# Altium PCB tl.PcbDoc
Units mm, origin at the board's own origin, x right, y up, seen from the top; angles counter-clockwise.
Board outline 60.1 x 82.1 mm, 4 copper layers (Top Layer, Layer 1, Layer 2, Bottom Layer), stack 0.603 mm thick; 8 components, 5 nets, 40 pads, 136 vias.
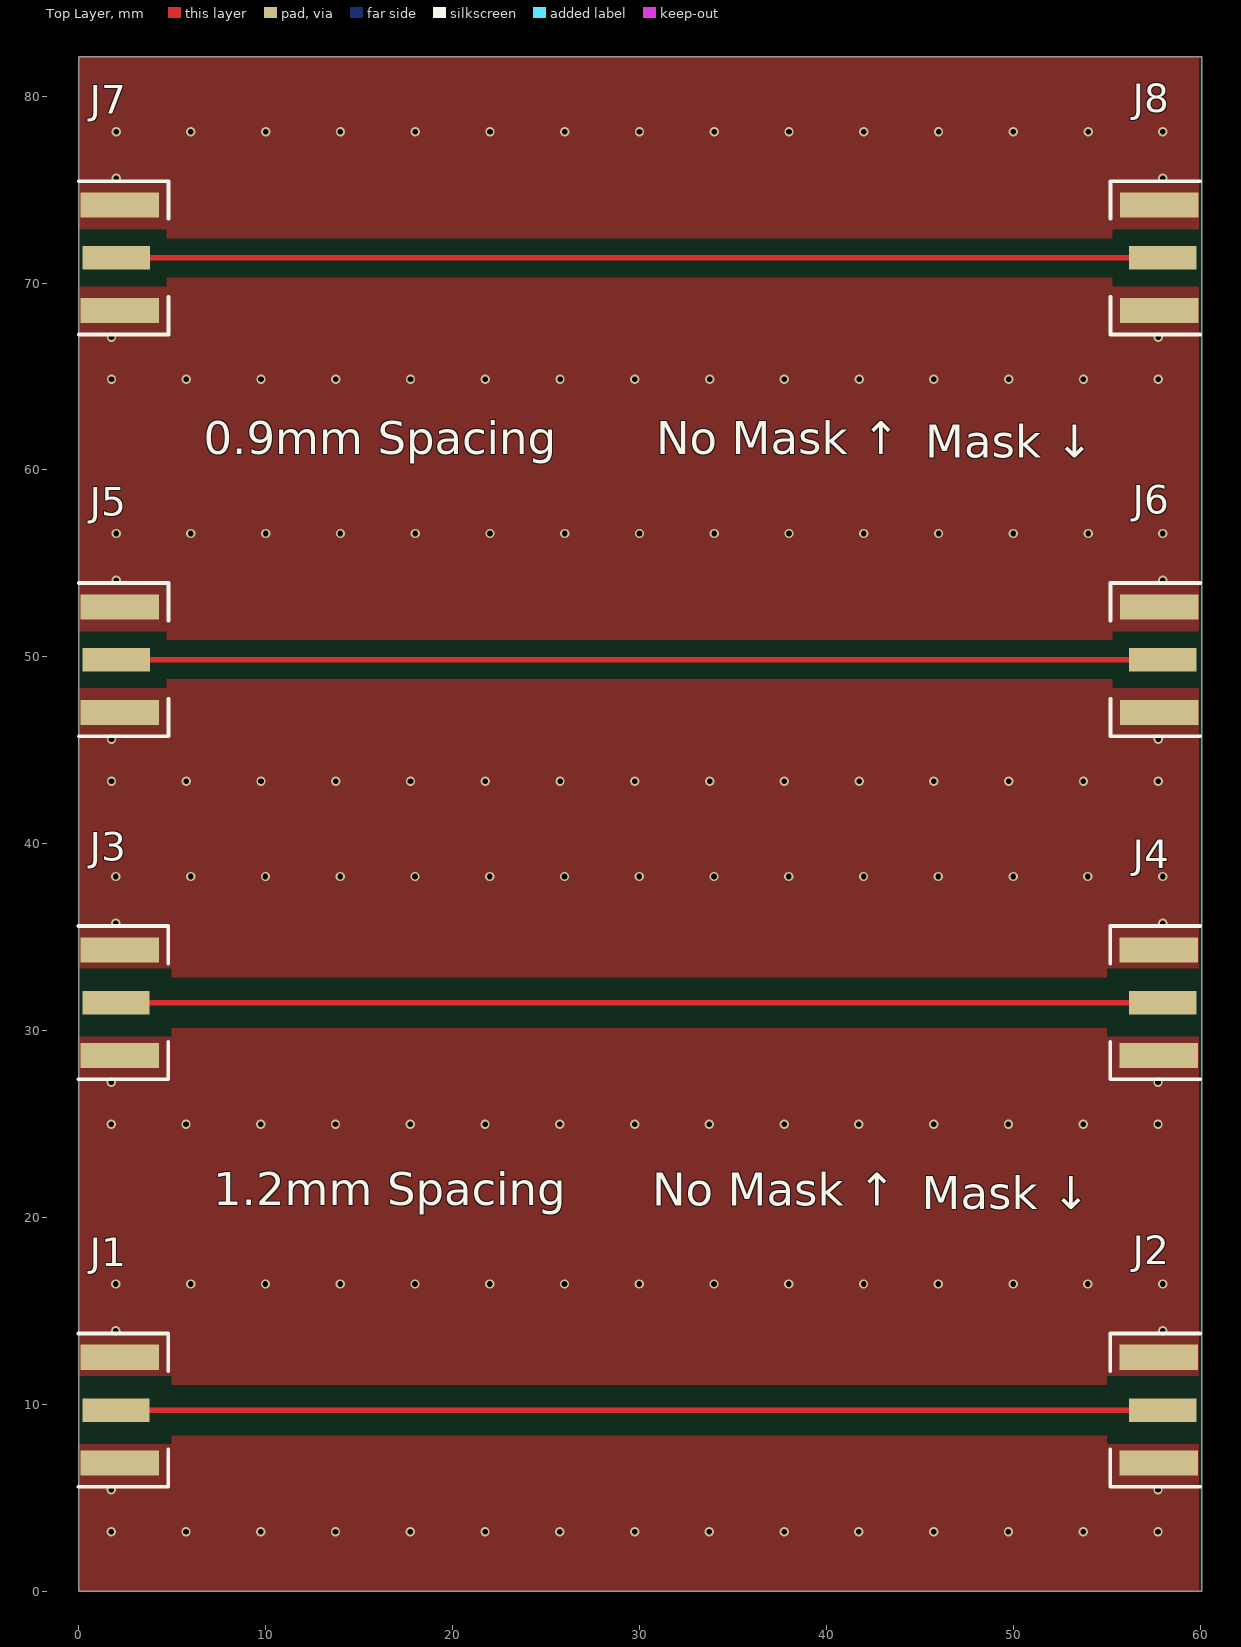
[diagram p0: Top Layer view]
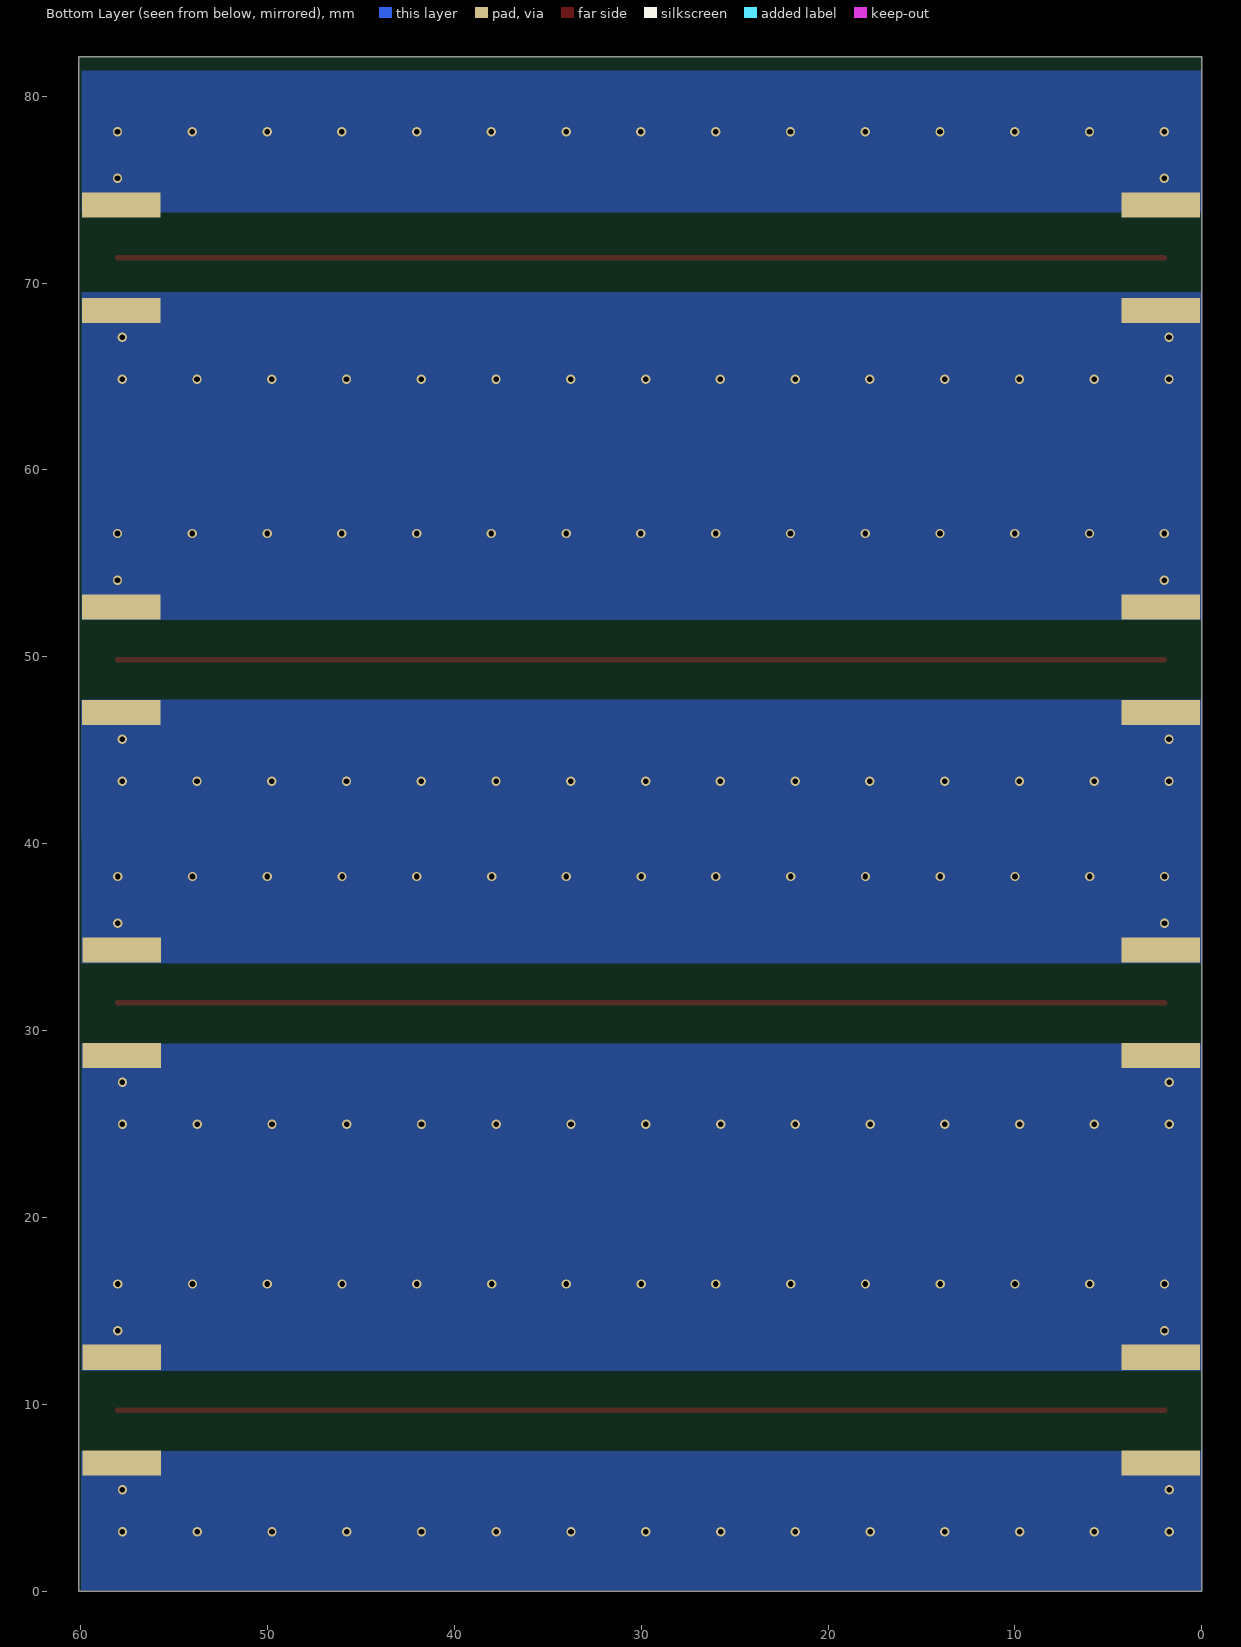
[diagram p1: Bottom Layer view, seen from below]
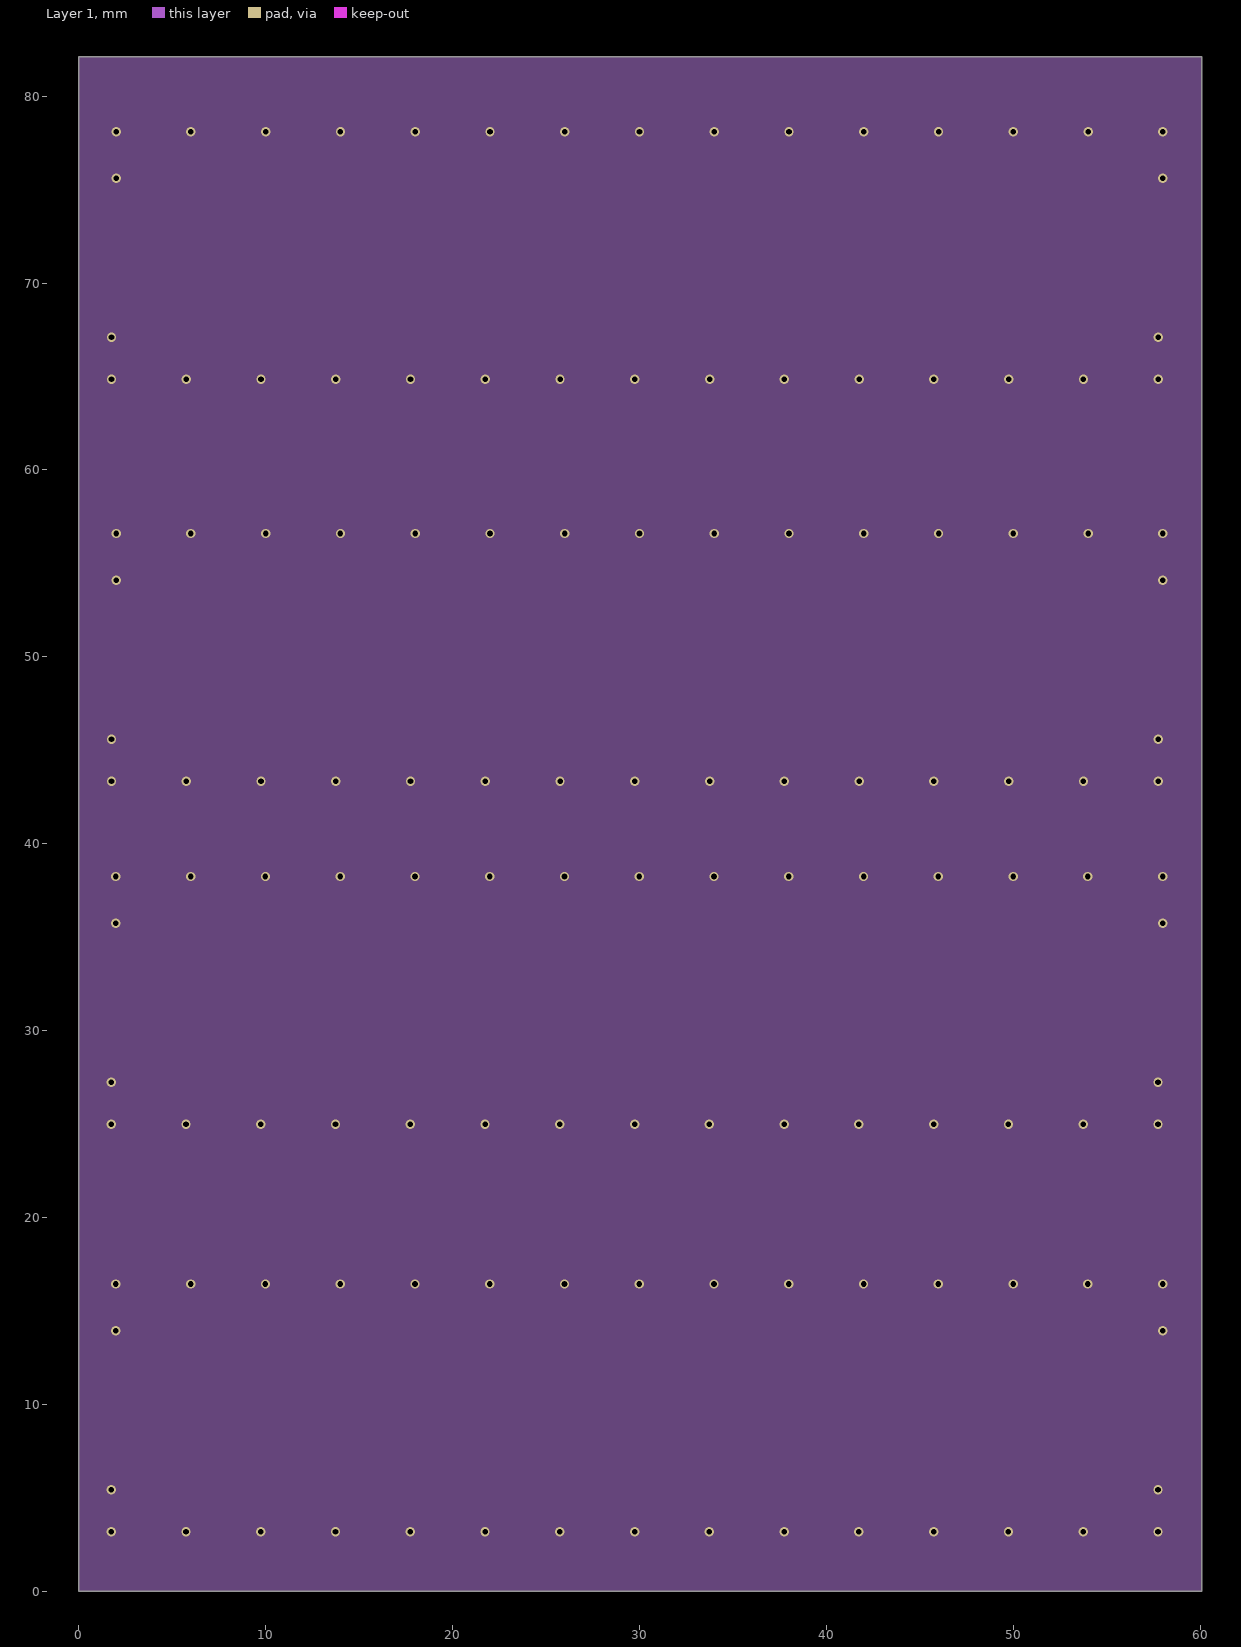
[diagram p2: Layer 1]
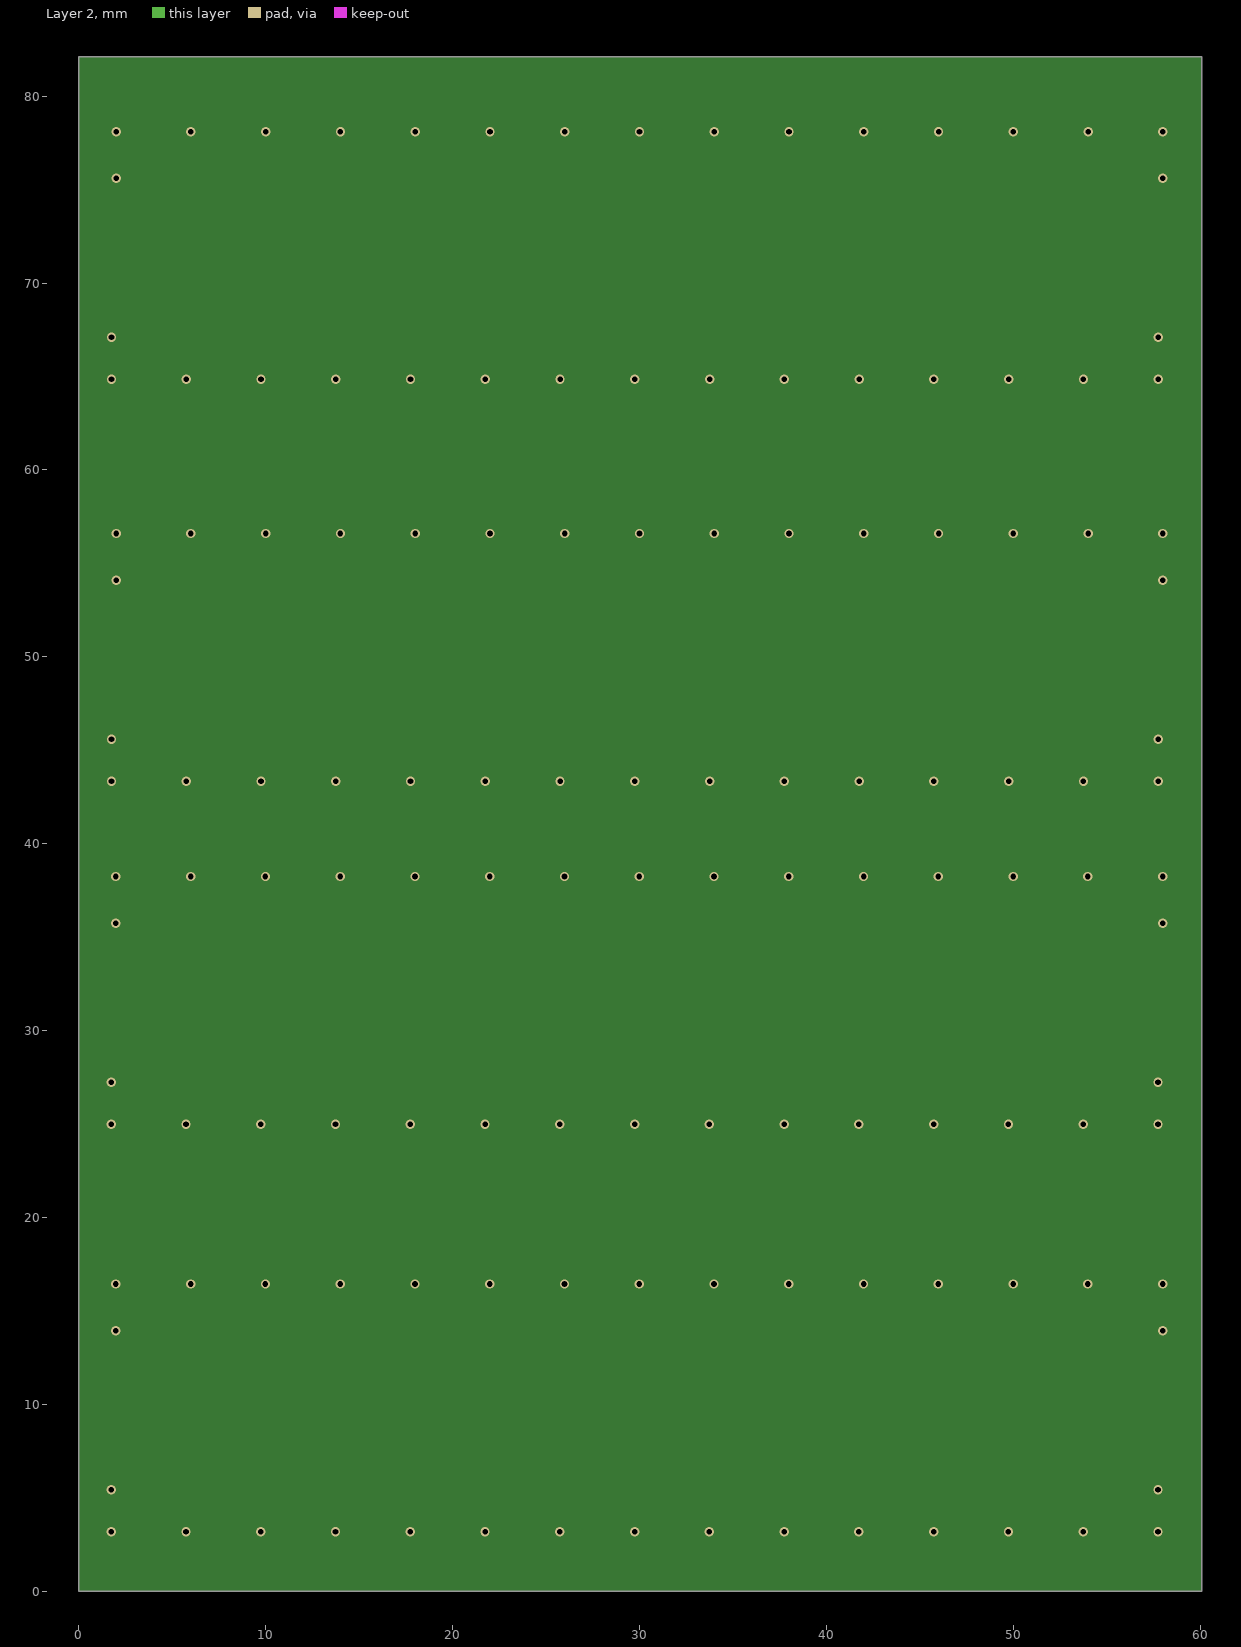
[diagram p3: Layer 2]
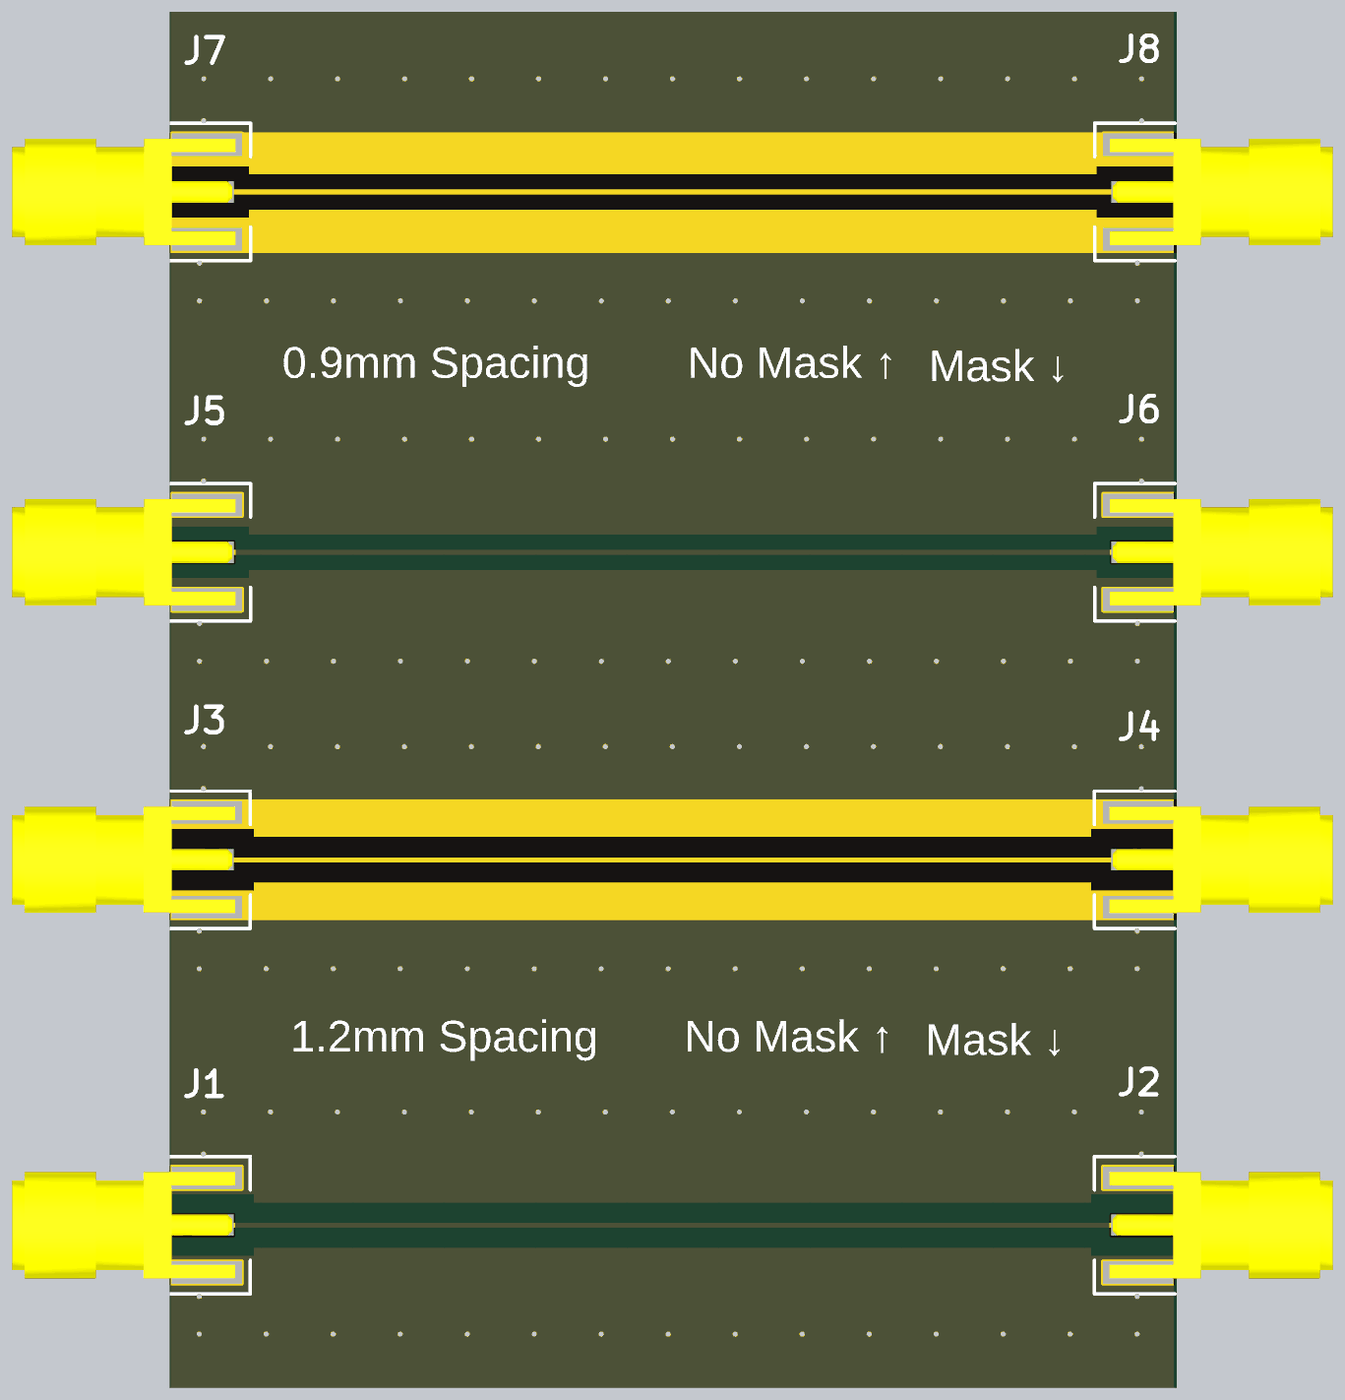
[diagram p4: 3D render of the assembled board from above, using the file's embedded part models]

## Layer stack, top to bottom
Top Solder: solder mask 0.0102, Solder Resist, Dk 3.5
Top Layer: signal copper 0.0356
Dielectric 2: prepreg 0.0711, PP-006, Dk 4.1
Layer 1: signal copper 0.035
Dielectric 1: dielectric 0.32, FR-4, Dk 4.8
Layer 2: signal copper 0.035
Dielectric 3: prepreg 0.0711, PP-006, Dk 4.1
Bottom Layer: signal copper 0.0356
Bottom Solder: solder mask 0.0102, Solder Resist, Dk 3.5

## Board outline
0,0 0,82.1 60.1,82.1 60.1,0

## Design rules (kind name [scope] priority, off if disabled: settings)
Clearance Clearance_1.2 [InNetClass('1.2mm Spacing')] p1: gap=1.2 ignorepadtopadclearanceinfootprint=FALSE except(0: Arc-Hole Track-Hole SMDPad-Hole THPad-Hole Via-Hole Fill-Hole Poly-Hole Region-Hole Text-Hole; 0.254: Arc-Via Arc-Text Track-Via Track-Text SMDPad-SMDPad SMDPad-THPad SMDPad-Via SMDPad-Text THPad-THPad THPad-Via THPad-Text Via-Via Via-Text Fill-Text Poly-Text Region-Text Text-Text)
Clearance Clearance_0.9 [InNetClass('0.9mm Spacing') vs InNetClass('All Nets')] p2: gap=0.9 ignorepadtopadclearanceinfootprint=FALSE except(0: Arc-Hole Track-Hole SMDPad-Hole THPad-Hole Via-Hole Fill-Hole Poly-Hole Region-Hole Text-Hole; 0.254: Arc-Via Arc-Text Track-Via Track-Text SMDPad-SMDPad SMDPad-THPad SMDPad-Via SMDPad-Text THPad-THPad THPad-Via THPad-Text Via-Via Via-Text Fill-Text Poly-Text Region-Text Text-Text)
PlaneConnect [All] p1: planeconnectstyle=Direct reliefexpansion=0.508 reliefentries=4 reliefconductorwidth=0.254 reliefairgap=0.254
PolygonConnect [All] p1: connectstyle=Direct reliefconductorwidth=0.254 reliefentries=4 polygonreliefangle="90 Angle" airgapwidth=0.254
RoutingVias [All] p1: holewidth=0.5 width=0.7 viastyle="Through Hole" minholewidth=0.3 minwidth=0.4 maxholewidth=1.2 maxwidth=2
SolderMaskExpansion [All] p1: expansion=0.102 istentingtop=FALSE
Width [All] p1: maxlimit=4 minlimit=0.254 preferedwidth=1
29 further rules are at their usual default settings.

## Classes and differential pairs
net class "1.2mm Spacing": NetJ1_1 NetJ3_1
net class "0.9mm Spacing": NetJ5_1 NetJ7_1

## Components (designator, comment, footprint, x,y, rotation, side; value= is the part's Value field where it differs from the comment)
J1 "SMA-J-P-H-ST-EM1" "SAMTEC SMA-J-P-H-ST-EM1" 2,9.7 r0 top
J2 "SMA-J-P-H-ST-EM1" "SAMTEC SMA-J-P-H-ST-EM1" 58,9.7 r180 top
J3 "SMA-J-P-H-ST-EM1" "SAMTEC SMA-J-P-H-ST-EM1" 2,31.5 r0 top
J4 "SMA-J-P-H-ST-EM1" "SAMTEC SMA-J-P-H-ST-EM1" 58,31.5 r180 top
J5 "SMA-J-P-H-ST-EM1" "SAMTEC SMA-J-P-H-ST-EM1" 2.012,49.85 r0 top
J6 "SMA-J-P-H-ST-EM1" "SAMTEC SMA-J-P-H-ST-EM1" 58.012,49.85 r180 top
J7 "SMA-J-P-H-ST-EM1" "SAMTEC SMA-J-P-H-ST-EM1" 2.012,71.35 r0 top
J8 "SMA-J-P-H-ST-EM1" "SAMTEC SMA-J-P-H-ST-EM1" 58.012,71.35 r180 top

## Footprints (in the part's own frame and the unit in brackets; to place one, negate y for a bottom-side part, rotate by r counter-clockwise, add the part's x,y. Pads: shape width x height; smd on the part's side, far side on the other; paste and mask are expansions set on the pad)
"SAMTEC SMA-J-P-H-ST-EM1" [mm]
  rect 3.6x1.27 smd: 1(0,0)
  rect 4.2x1.35 smd: 2(0.2,-2.825) 2(0.2,2.825)
  rect 4.2x1.35 smd far side: 2(0.2,-2.825) 2(0.2,2.825)
  silkscreen extent -2,-4.1 2.8,4.1, body extent -11.43,-3.17 1.91,3.17, height 3.67

## Part data
J1 J2 J3 J4 J5 J6 J7 J8: "CONN SMA JACK STR 50OHM EDGE MNT", Device Package=Tray, Frequency - Max=20GHz, Housing Color=Gold, Manufacturer="Samtec Inc.", Operating Temperature="-65°C ~ 125°C", Supplier Part Number 1=SAM8857-ND, Voltage Rating=335V, Body Finish=Gold, Body Material=Brass, Cable Group=-, Center Contact Material="Beryllium Copper", Center Contact Plating=Gold, ComponentLink1Description=Datasheet, ComponentLink1URL=http://suddendocs.samtec.com/catalog_english/sma.pdf, ComponentLink2Description=Drawing, ComponentLink2URL=http://suddendocs.samtec.com/prints/sma-j-p-x-st-em1-mkt.pdf, ComponentLink3Description="Digikey Link", ComponentLink3URL=https://www.digikey.com/products/en?keywords=SMA-J-P-H-ST-EM1, Connector Style=SMA, Dialetric Material="Polytetrafluoroethylene (PTFE)", Fastening Type=Threaded, Features=-, Insertion Loss=-, LastUpdated="2020-03-11 6:05:05 AM", Lifecycle Status=Active, Mating Cycles=-, Minimum Order=1, Mounting Feature=-, Mounting Type="Board Edge, End Launch", Number of Ports=1, Packaging=Tray, Part Number=SMA-J-P-H-ST-EM1, Part Status=Active, Price=4.33, Series=-, Supplier 1=DigiKey

## Via types
v1: diameter 0.5, hole 0.3, Top Layer to Bottom Layer, tented both sides, 136 vias

## Nets (pads, with @x,y where several pads share a name; then routed paths per layer and width w, separated by ;. In a path a pad name is that pad's centre, name@x,y a point inside that pad or via, vN(x,y) a via of type N, cw(c..) or ccw(c..) an arc to the next point about the centre after c; other vN are vias at no path point)
GND: J1.2 J2.2 J3.2 J4.2 J5.2 J6.2 J7.2 J8.2
  other v1: 1.75,3.2 5.75,3.2 9.75,3.2 13.75,3.2 17.75,3.2 21.75,3.2 25.75,3.2 29.75,3.2 33.75,3.2 37.75,3.2 41.75,3.2 45.75,3.2 49.75,3.2 53.75,3.2 57.75,3.2 1.75,5.45 57.75,5.45 2,13.95 58,13.95 2,16.45 6,16.45 10,16.45 14,16.45 18,16.45 22,16.45 26,16.45 30,16.45 34,16.45 38,16.45 42,16.45 46,16.45 50,16.45 54,16.45 58,16.45 1.75,25 5.75,25 9.75,25 13.75,25 17.75,25 21.75,25 25.75,25 29.75,25 33.75,25 37.75,25 41.75,25 45.75,25 49.75,25 53.75,25 57.75,25 1.75,27.25 57.75,27.25 2,35.75 58,35.75 2,38.25 6,38.25 10,38.25 14,38.25 18,38.25 22,38.25 26,38.25 30,38.25 34,38.25 38,38.25 42,38.25 46,38.25 50,38.25 54,38.25 58,38.25 1.762,43.35 5.762,43.35 9.762,43.35 13.762,43.35 17.762,43.35 21.762,43.35 25.762,43.35 29.762,43.35 33.762,43.35 37.762,43.35 41.762,43.35 45.762,43.35 49.762,43.35 53.762,43.35 57.762,43.35 1.762,45.6 57.762,45.6 2.012,54.1 58.012,54.1 2.012,56.6 6.012,56.6 10.012,56.6 14.012,56.6 18.012,56.6 22.012,56.6 26.012,56.6 30.012,56.6 34.012,56.6 38.012,56.6 42.012,56.6 46.012,56.6 50.012,56.6 54.012,56.6 58.012,56.6 1.762,64.85 5.762,64.85 9.762,64.85 13.762,64.85 17.762,64.85 21.762,64.85 25.762,64.85 29.762,64.85 33.762,64.85 37.762,64.85 41.762,64.85 45.762,64.85 49.762,64.85 53.762,64.85 57.762,64.85 1.762,67.1 57.762,67.1 2.012,75.6 58.012,75.6 2.012,78.1 6.012,78.1 10.012,78.1 14.012,78.1 18.012,78.1 22.012,78.1 26.012,78.1 30.012,78.1 34.012,78.1 38.012,78.1 42.012,78.1 46.012,78.1 50.012,78.1 54.012,78.1 58.012,78.1
NetJ1_1: J1.1 J2.1 | length 56
  Top Layer w0.293: J1.1 J2.1
NetJ3_1: J3.1 J4.1 | length 56
  Top Layer w0.293: J3.1 J4.1
NetJ5_1: J5.1 J6.1 | length 56
  Top Layer w0.293: J5.1 J6.1
NetJ7_1: J7.1 J8.1 | length 56
  Top Layer w0.293: J7.1 J8.1

## Polygon pours and split planes (outlines as drawn)
GND on Top Layer "Top Layer-GND" (solid, pour order 8): 0.038,82.12 59.938,82.12 59.938,0 0.038,0
GND on Bottom Layer "Top Layer-GND" (solid, pour order 13): 0.038,81.346 59.938,81.346 59.938,73.8 0.038,73.8
GND on Bottom Layer "Top Layer-GND 1" (solid, pour order 12): 0.046,47.7 59.946,47.7 59.946,40.254 0.046,40.254
GND on Bottom Layer "Top Layer-GND" (solid, pour order 11): 0.038,69.5 59.938,69.5 59.938,52 0.038,52
GND on Bottom Layer "Top Layer-GND" (solid, pour order 9): 0.038,41.146 59.938,41.146 59.938,33.6 0.038,33.6
GND on Bottom Layer "Top Layer-GND 1" (solid, pour order 6): 0.046,7.5 59.946,7.5 59.946,0.054 0.046,0.054
GND on Bottom Layer "Top Layer-GND" (solid, pour order 5): 0.038,29.3 59.938,29.3 59.938,11.8 0.038,11.8
no net on Top Solder "NONET_L-01_P-001" (solid): 0,74.9 0,67.7 60.1,67.7 60.1,74.9
no net on Top Solder "NONET_L-01_P-001" (solid): 0,35.1 0,27.9 60.1,27.9 60.1,35.1
GND on Layer 2 "NONET_L-01_P-001" (solid, pour order 15): 0,0 0,82.1 60.1,82.1 60.1,0
GND on Layer 1 "NONET_L-01_P-001" (solid, pour order 14): 0,0 0,82.1 60.1,82.1 60.1,0

## Silkscreen, mask and mechanical layers (free items; w line width, h text height)
Top Overlay:
  text "0.9mm Spacing" at 6.7,60.263 h3
  text "No Mask ↑" at 30.9,60.26 h3
  text "Mask ↓" at 45.3,60.06 h3
  text "1.2mm Spacing" at 7.2,20.063 h3
  text "No Mask ↑" at 30.7,20.06 h3
  text "Mask ↓" at 45.1,19.86 h3
Mechanical 1:
  the board outline again, w0.254